# Altium PCB KorszeOBD.PcbDoc
Units mm, origin at the board's own origin, x right, y up, seen from the top; angles counter-clockwise.
Board outline 37.13 x 29 mm, 2 copper layers (Top Layer, Bottom Layer), stack 0.325 mm thick; 47 components, 37 nets, 207 pads, 0 vias.
Unrouted connection lines stored in the file: 112.
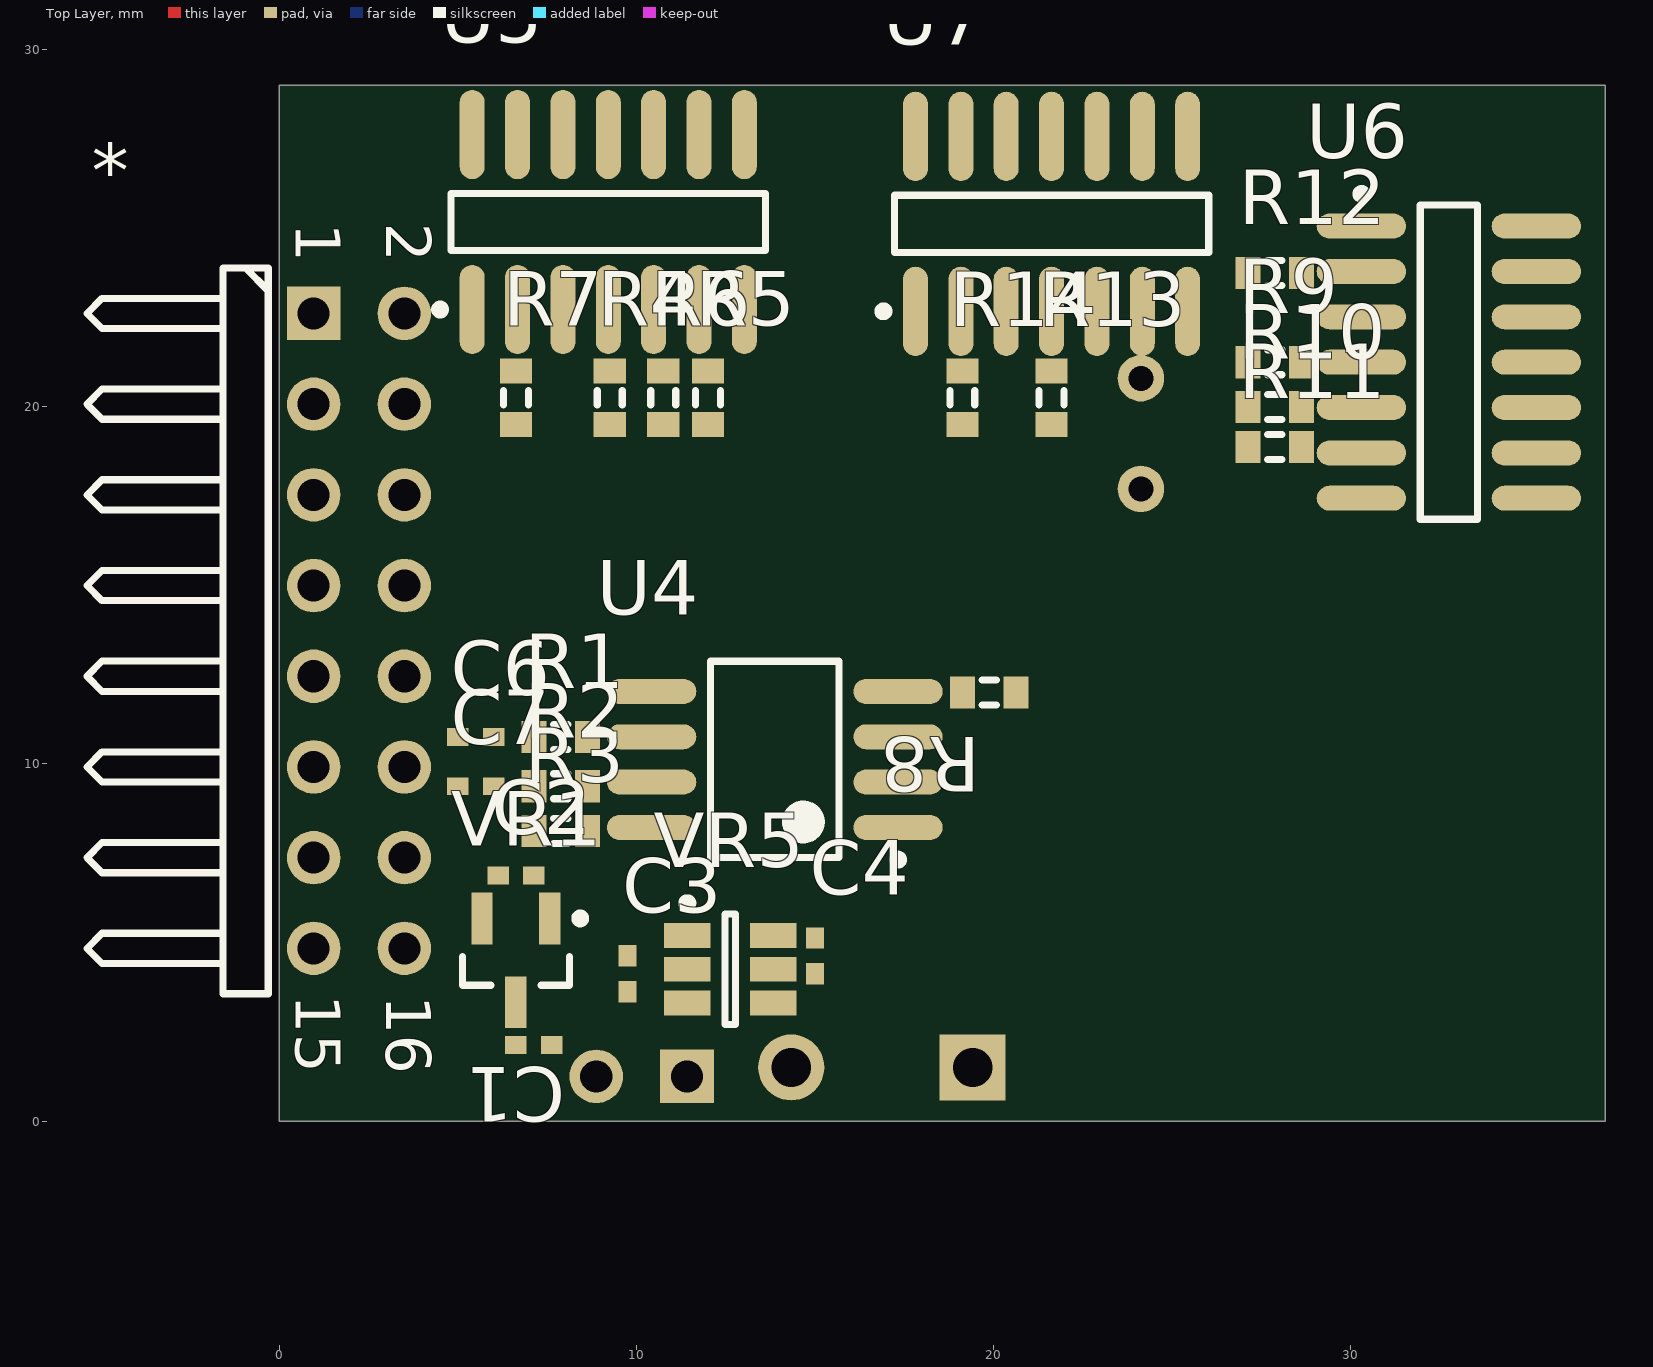
[diagram p0: Top Layer view]
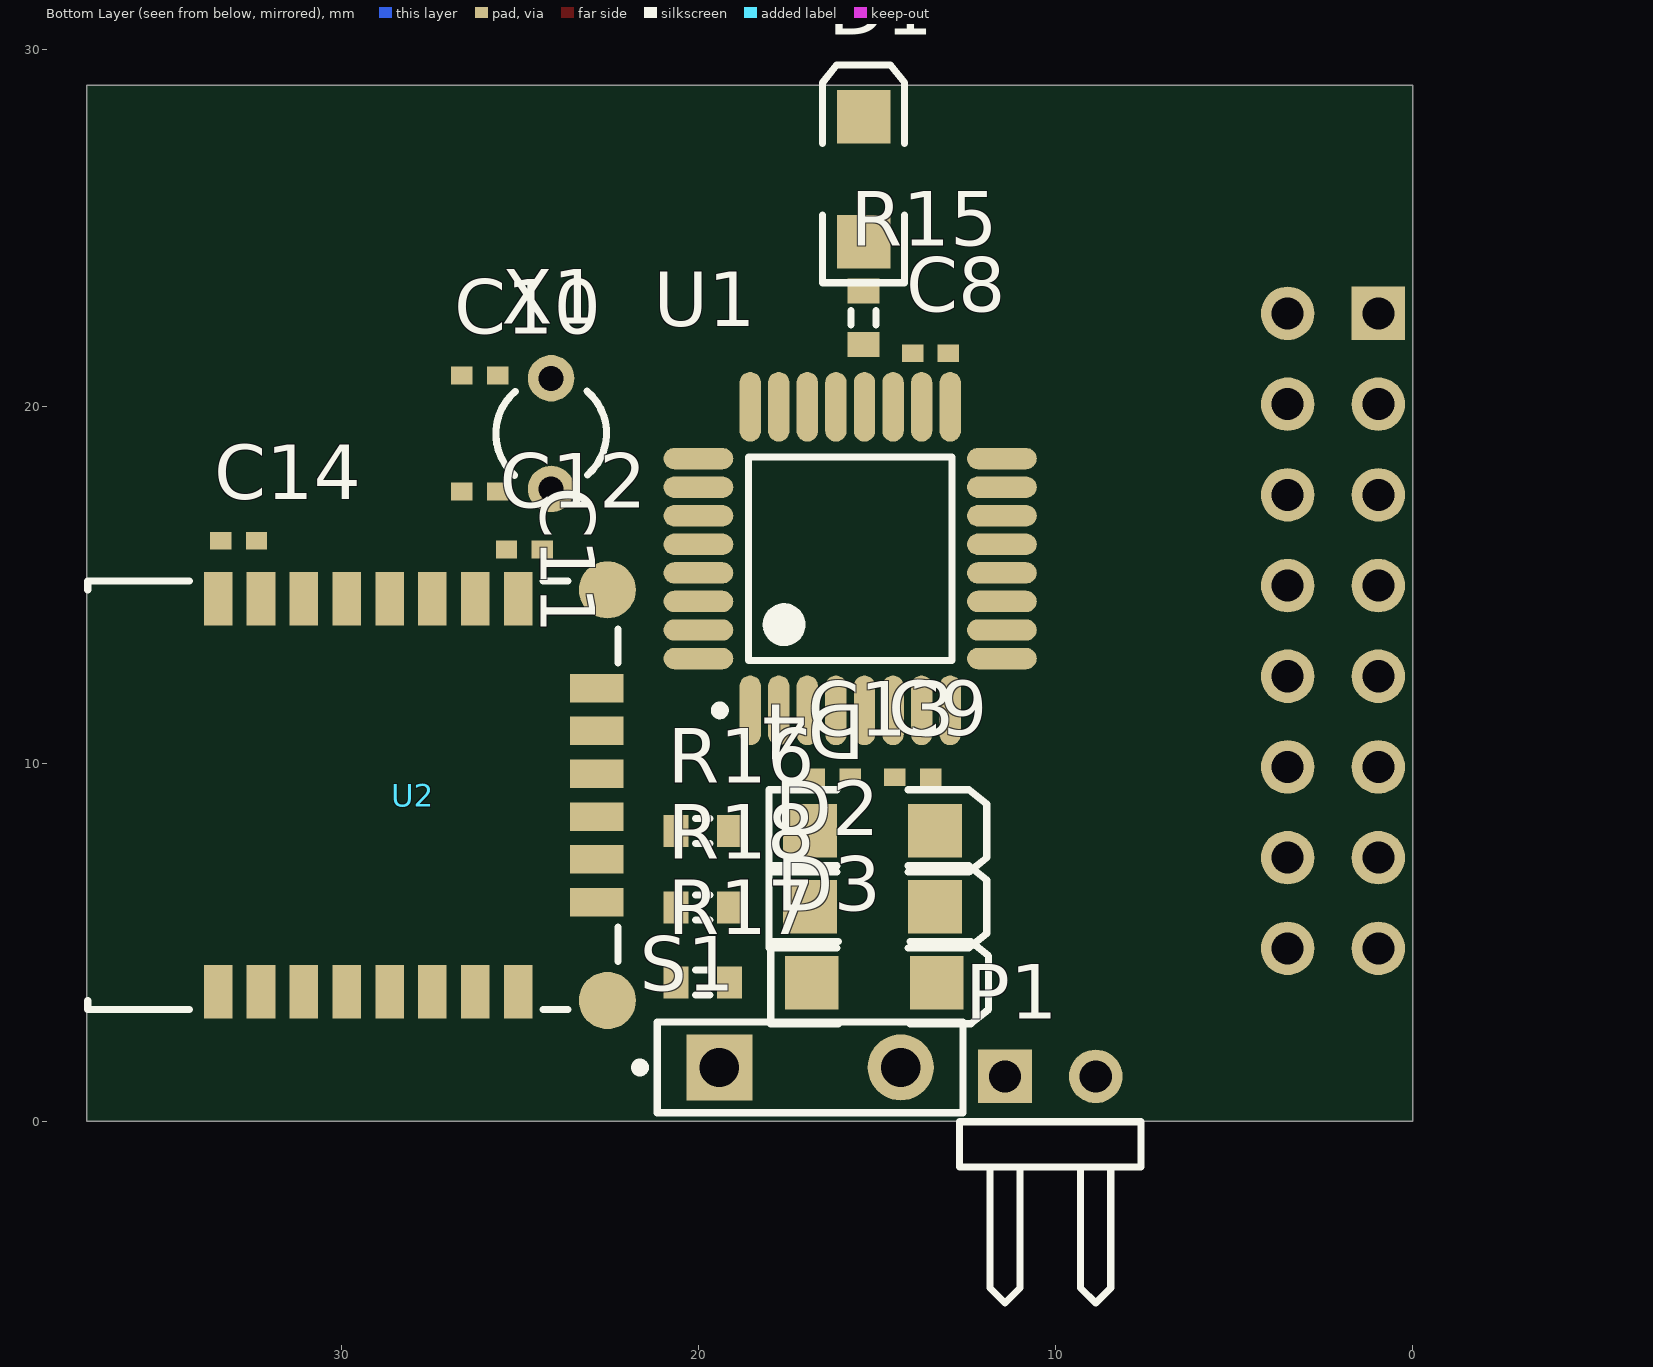
[diagram p1: Bottom Layer view, seen from below]

## Layer stack, top to bottom
Top Solder: solder mask 0.0102, Solder Resist, Dk 3.5
Top Layer: signal copper 0.0356
Dielectric1: core 0.254, FR-4, Dk 4.2
Bottom Layer: signal copper 0.0356
Bottom Solder: solder mask 0.0102, Solder Resist, Dk 3.5

## Board outline
0,0 0,29 37.125,29 37.125,0

## Design rules (kind name [scope] priority, off if disabled: settings)
Clearance [All] p1: gap=0.254
FabricationTestPointUsage TestPointUsage [All] p1: valid=0 allowmultiple=FALSE
FabricationTestpoint Testpoint [All] p1: side=3 testpointundercomponent=TRUE minsize=1.016 maxsize=2.54 preferedsize=1.524 minholesize=0 maxholesize=1.016 preferedholesize=0.813 testpointgrid=0.025 allowsidetop=TRUE allowsidebottom=TRUE usegrid=TRUE gridtolerance=0
PolygonConnect [All] p1: connectstyle=Relief reliefconductorwidth=0.254 reliefentries=4 polygonreliefangle="90 Angle" airgapwidth=0.254
RoutingVias [All] p1: holewidth=0.711 width=1.27 viastyle="Through Hole" minholewidth=0.711 minwidth=1.27 maxholewidth=0.711 maxwidth=1.27
SilkToSolderMaskClearance SilkscreenOverComponentPads [IsPad] p1: minsilkscreentomaskgap=0.254 clearancetoexposedcopper=TRUE
SolderMaskExpansion [All] p1: expansion=0.102
Width Width_Power [(InNet('12V') OR InNet('3.3V') OR InNet('5V'))] p1: maxlimit=0.254 minlimit=0.254 preferedwidth=0.254
Width [All] p2: maxlimit=0.254 minlimit=0.254 preferedwidth=0.254
27 further rules are at their usual default settings.

## Components (designator, comment, footprint, x,y, rotation, side; value= is the part's Value field where it differs from the comment)
* "ODBII" HDR2X8H 0.96,22.615 r270 top
C1 "1uF" 0402 7.125,2.125 r180 top
C2 "1uF" 0402 6.625,6.875 r180 top
C3 "1uF" 0402 9.75,4.125 r90 top
C4 "1uF" 0402 15,4.625 r90 top
C6 "560pF" 0402 5.5,10.75 r0 top
C7 "560pF" 0402 5.5,9.375 r180 top
C8 "100nF" 0402 13.5,21.5 r180 bottom
C9 "100nF" 0402 14,9.625 r180 bottom
C10 "20pF" 0402 26.125,20.875 r0 bottom
C11 "20pF" 0402 26.125,17.625 r0 bottom
C12 "100nF" 0402 24.875,16 r0 bottom
C13 "100nF" 0402 16.25,9.625 r180 bottom
C14 "4.7uF" 0402 32.875,16.25 r0 bottom
D1 "LED0" 3.2X1.6X1.1 15.375,26.375 r90 bottom
D2 "Blue" 3.2X1.6X1.1 15.125,6 r180 bottom
D3 "Red" 3.2X1.6X1.1 15.075,3.875 r180 bottom
D4 "Green" 3.2X1.6X1.1 15.125,8.125 r180 bottom
P1 "USB" HDR1X2H 11.415,1.25 r180 bottom
R1 "100" J1-0603 7.875,10.75 r0 top
R2 "100" J1-0603 7.875,9.375 r180 top
R3 "4.7k" J1-0603 7.875,8.125 r0 top
R4 "10k" J1-0603 9.25,20.25 r90 top
R5 "1.2k" J1-0603 12,20.25 r270 top
R6 "4.7k" J1-0603 10.75,20.25 r90 top
R7 "10k" J1-0603 6.625,20.25 r270 top
R8 "4.7k" J1-0603 19.875,12 r180 top
R9 "100k" J1-0603 27.875,21.25 r0 top
R10 "10k" J1-0603 27.875,20 r180 top
R11 "10k" J1-0603 27.875,18.875 r0 top
R12 "10k" J1-0603 27.875,23.75 r180 top
R13 "10k" J1-0603 21.625,20.25 r90 top
R14 "10k" J1-0603 19.125,20.25 r270 top
R15 "330" J1-0603 15.375,22.5 r90 bottom
R16 "330" J1-0603 19.875,8.125 r0 bottom
R17 "330" J1-0603 19.875,3.875 r0 bottom
R18 "330" J1-0603 19.875,5.98 r0 bottom
S1 "SW-PB" SPST-2 16.875,1.5 r180 bottom
U1 "SMT32F0" QFP32_M 15.75,15.75 r90 bottom
U2 "RN2020-V/RM" "RN4020 MODULE-24" 28,9.125 r90 bottom
U4 "MCP2551" SO8W_M 13.875,10.125 r180 top
U5 "LM339AD" SO14_M 9.21,25.175 r90 top
U6 "LM339AD" SO14_M 32.75,21.25 r0 top
U7 "LM339AD" SO14_M 21.625,25.125 r90 top
VR1 "MCP1703T-33" SOT-23_M 6.625,4.5 r270 top
VR5 "MCP1755T-5" SOT23-6_M 12.625,4.25 r0 top
X1 "8MHz" R38 24.125,19.25 r0 bottom

## Footprints (in the part's own frame and the unit in brackets; to place one, negate y for a bottom-side part, rotate by r counter-clockwise, add the part's x,y. Pads: shape width x height; smd on the part's side, far side on the other; paste and mask are expansions set on the pad)
3.2X1.6X1.1 [mm] "SMT LED; 2 Flat Leads"
  rect 1.5x1.5 smd: 1(-1.75,0) 2(1.75,0)
  silkscreen extent -2.9,-1.15 3.2,1.15
0402 [mm] "Chip Capacitor, Body 1.0x0.5mm, IPC High Density"
  rect 0.6x0.5 smd: 1(-0.5,0) 2(0.5,0)
  body extent -0.55,-0.3 0.55,0.3, height 1.3
HDR1X2H [mm] "Connector; Header; 2 Position; Right Angle"
  rect 1.5x1.5 hole 0.9: 1(0,0)
  round 1.5 hole 0.9: 2(2.54,0)
  silkscreen extent -1.27,-6.35 3.81,-1.27
HDR2X8H [mm] "Connector; Header; 8x2 Position; Right Angle"
  rect 1.5x1.5 hole 0.9: 1(0,0)
  round 1.5 hole 0.9: 2(0,2.54) 3(2.54,0) 4(2.54,2.54) 5(5.08,0) 6(5.08,2.54) 7(7.62,0) 8(7.62,2.54) 9(10.16,0) 10(10.16,2.54) 11(12.7,0) 12(12.7,2.54) 13(15.24,0) 14(15.24,2.54) 15(17.78,0) 16(17.78,2.54)
  silkscreen extent -1.27,-6.35 19.05,-1.27
J1-0603 [mm] "Chip Resistor, Body 1.6x0.8mm, IPC High Density"
  rect 0.7x0.9 smd: 1(-0.75,0) 2(0.75,0)
  silkscreen extent -0.2,-0.35 0.2,0.35, body extent -0.85,-0.48 0.85,0.48, height 0.9
QFP32_M [mm] "32-Pin Quad Flat Pack 0.8 mm Pitch, IPC Low Density"
  oval 1.95x0.6 smd: 1(-4.25,2.8) 2(-4.25,2) 3(-4.25,1.2) 4(-4.25,0.4) 5(-4.25,-0.4) 6(-4.25,-1.2) 7(-4.25,-2) 8(-4.25,-2.8) 17(4.25,-2.8) 18(4.25,-2) 19(4.25,-1.2) 20(4.25,-0.4) 21(4.25,0.4) 22(4.25,1.2) 23(4.25,2) 24(4.25,2.8)
  oval 0.6x1.95 smd: 9(-2.8,-4.25) 10(-2,-4.25) 11(-1.2,-4.25) 12(-0.4,-4.25) 13(0.4,-4.25) 14(1.2,-4.25) 15(2,-4.25) 16(2.8,-4.25) 25(2.8,4.25) 26(2,4.25) 27(1.2,4.25) 28(0.4,4.25) 29(-0.4,4.25) 30(-1.2,4.25) 31(-2,4.25) 32(-2.8,4.25)
  silkscreen extent -4.37,-2.85 2.85,3.78, body extent -3.5,-3.5 3.5,3.5, height 1.85
R38 [mm] "Crystal, Thru-Hole; 2 Leads; Body 3.1 x 8.2 mm (Dia.xH)"
  round 1.3 hole 0.7: 1(0,1.55) 2(0,-1.55)
  silkscreen extent -1.55,-1.19 1.55,1.17
"RN4020 MODULE-24" [mm]
  rect 1.5x0.8 smd: 1(-5.5,5.45) 2(-5.5,4.25) 3(-5.5,3.05) 4(-5.5,1.85) 5(-5.5,0.65) 6(-5.5,-0.55) 7(-5.5,-1.75) 8(-5.5,-2.95) 17(5.5,-2.95) 18(5.5,-1.75) 19(5.5,-0.55) 20(5.5,0.65) 21(5.5,1.85) 22(5.5,3.05) 23(5.5,4.25) 24(5.5,5.45)
  round 1.6 smd: 9(-5.75,-5.45) 16(5.75,-5.45)
  rect 0.8x1.5 smd: 10(-3,-5.15) 11(-1.8,-5.15) 12(-0.6,-5.15) 13(0.6,-5.15) 14(1.8,-5.15) 15(3,-5.15)
  silkscreen extent -6,-5.75 6,9.1, body extent -5.75,-5.45 5.75,14.05, height 2.3
SO8W_M [mm] "8-Pin Small Outline Package 1.27 mm Pitch, IPC Low Density"
  oval 2.5x0.7 smd: 1(-3.45,1.905) 2(-3.45,0.635) 3(-3.45,-0.635) 4(-3.45,-1.905) 5(3.45,-1.905) 6(3.45,-0.635) 7(3.45,0.635) 8(3.45,1.905)
  silkscreen extent -3.57,-2.75 1.8,2.93, body extent -2.73,-2.75 2.73,2.75, height 2.13
SO14_M [mm] "SOIC, 14-Leads, Body 8.7x3.9mm, Pitch 1.27mm, IPC Low Density"
  oval 2.5x0.7 smd: 1(-2.45,3.81) 2(-2.45,2.54) 3(-2.45,1.27) 4(-2.45,0) 5(-2.45,-1.27) 6(-2.45,-2.54) 7(-2.45,-3.81) 8(2.45,-3.81) 9(2.45,-2.54) 10(2.45,-1.27) 11(2.45,0) 12(2.45,1.27) 13(2.45,2.54) 14(2.45,3.81)
  silkscreen extent -2.57,-4.4 0.8,4.83, body extent -2,-4.38 2,4.38, height 1.75
SOT23-6_M [mm] "SOT23, 6-Leads, Body 2.9x1.6mm, Pitch 0.95mm, Lead Span 2.7mm, IPC Low Density"
  rect 1.3x0.7 smd: 1(-1.2,0.95) 2(-1.2,0) 3(-1.2,-0.95) 4(1.2,-0.95) 5(1.2,0) 6(1.2,0.95)
  silkscreen extent -1.32,-1.55 0.15,1.97, body extent -0.9,-1.55 0.9,1.55, height 1.45
SOT-23_M [mm] "SOT23, 3-Leads, Body 2.9x1.3mm, Pitch 0.95mm, Lead Span 2.5mm, IPC Low Density"
  rect 1.45x0.6 smd: 1(-1.175,0.95) 2(-1.175,-0.95) 3(1.175,0)
  silkscreen extent -1.3,-1.5 0.7,1.93, body extent -0.7,-1.5 0.7,1.5, height 1.1
SPST-2 [mm] "Switch; 2 Leads"
  rect 1.85x1.85 hole 1.1: 1(-2.54,0)
  round 1.85 hole 1.1: 2(2.54,0)
  silkscreen extent -4.89,-1.27 4.28,1.27

## Part data
C1 C2 C3 C4 C6 C7 C8 C9 C10 C11 C12 C13 C14: library part Cap, "Capacitor"
D1: "Typical INFRARED GaAs LED"
D2 D3 D4: library part LED0, "Typical INFRARED GaAs LED"
P1: library part "Header 2H", "Header, 2-Pin, Right Angle"
R1 R2 R3 R4 R5 R6 R7 R8 R9 R10 R11 R12 R13 R14 R15 R16 R17 R18: library part Res2, "Resistor"
S1: "Switch"
U1: library part STM32F030K6T6, "STM32F030K6T6"
U2: library part RN2020-V/RM123, "Microchip RN4020 Bluetooth"
U4: library part MCP2551-E/SN, "CAN Transceiver Michrochip Technology MCP2551-E/SN"
U5 U6 U7: "Low-Power Quad Voltage Comparator"
VR1 VR5: library part "Volt Reg", "Voltage Regulator"
X1: library part XTAL, "Crystal Oscillator"

## Nets (pads, with @x,y where several pads share a name; then routed paths per layer and width w, separated by ;. In a path a pad name is that pad's centre, name@x,y a point inside that pad or via, vN(x,y) a via of type N, cw(c..) or ccw(c..) an arc to the next point about the centre after c; other vN are vias at no path point)
3.3V: C2.2 C8.2 C12.2 C14.1 R7.2 R8.1 R12.2 R14.2 U1.1 U1.5 U1.17 U2.23 U5.3 U6.3 U7.3 VR1.2
5V: C4.2 R5.2 R10.2 U4.3 VR5.6
12V: *.16 C1.2 C3.2 VR1.3 VR5.1
"CAN HIGH": *.6 R2.1 U4.7
"CAN LOW": *.14 R1.2 U4.6
GND: *.4 *.5 C1.1 C2.1 C3.1 C4.1 C6.1 C7.2 C8.1 C9.2 C10.2 C11.2 C12.1 C13.2 C14.2 D1.2 D2.2 D3.2 D4.2 R3.1 R6.1 R11.1 S1.2 U1.16 U1.32 U2.1 U2.9 U2.16 U2.24 U4.2 U5.12 U6.12 U7.12 VR1.1 VR5.2
"ISO9141-2 K": *.7 R9.1 R9.2 U6.4
"ISO9141-2 K OUT": R12.1 U1.25 U6.2
"ISO9141-2 L": *.15
"J1850 BUS+": *.2 R4.1 R4.2 U5.4 U7.5
"J1850 BUS+ OUT": R7.1 U1.20 U5.2
"J1850 BUS-": *.10 R13.1 R13.2 U7.4
"J1850 OUT": R14.1 U1.24 U7.2
NetC6_2: C6.2 R1.1
NetC7_1: C7.1 R2.2
NetC9_1: C9.1 U1.6
NetC13_1: C13.1 S1.1 U1.4
NetD1_1: D1.1 R15.2
NetD2_1: D2.1 R16.1
NetD3_1: D3.1 R17.1
NetD4_1: D4.1 R18.1
NetR15_1: R15.1 U1.19
NetU1_26: U1.26 U2.8
NetU1_27: U1.27 U2.7
NON_INV: R5.1 R6.2 R10.1 R11.2 U5.5 U6.5
OSC_IN: C11.1 U1.3 X1.1
OSC_OUT: C10.1 U1.2 X1.2
PIO1: R16.2 U1.23 U2.10
PIO2: R17.2 U1.14 U2.11
PIO3: R18.2 U1.13 U2.12
RS: R3.2 U4.8
RXD: R8.2 U1.22 U4.4
TXD: U1.21 U4.1
UART2_RX_STM: U1.30 U2.5
UART2_TX_STM: U1.28 U2.6
USART2_RX_USB_TX: P1.1 U1.9
USART2_TX_USB_RX: P1.2 U1.8
pads on no net: *.1 *.3 *.8 *.9 *.11 *.12 *.13 U1.7 U1.10 U1.11 U1.12 U1.15 U1.18 U1.29 U1.31 U2.2 U2.3 U2.4 U2.13 U2.14 U2.15 U2.17 U2.18 U2.19 U2.20 U2.21 U2.22 U4.5 U5.1 U5.6 U5.7 U5.8 U5.9 U5.10 U5.11 U5.13 U5.14 U6.1 U6.6 U6.7 U6.8 U6.9 U6.10 U6.11 U6.13 U6.14 U7.1 U7.6 U7.7 U7.8 U7.9 U7.10 U7.11 U7.13 U7.14 VR5.3 VR5.4 VR5.5

## Silkscreen, mask and mechanical layers (free items; w line width, h text height)
Mechanical 16:
  drawing of 1874 lines, arcs and shapes, not listed
  text "1" at -79.286,89.259 h1.78
  text "2" at -6.642,89.259 h1.78
  text "3" at 66.51,89.259 h1.78
  text "4" at 139.408,89.259 h1.78
  text "A" at -113.627,66.247 h1.78
  text "A" at 173.393,66.247 h1.78
  text "B" at -113.627,18.19 h1.78
  text "B" at 61.75,13.625 h1.78
  text "C" at -113.627,-30.324 h1.78
  text "C" at 173.393,-30.324 h1.78
  text "ENGINEER:" at 58.458,-67.332 h1.14
  text "TITLE:" at 96.558,-67.332 h1.14
  text "PCB DESIGNER:" at 58.458,-74.825 h1.14
  text "D" at -113.627,-78.33 h1.78
  text "D" at 173.393,-78.33 h1.78
  text "DATE:" at 58.458,-82.572 h1.14
  text "PART NO.:" at 96.558,-82.572 h1.14
  text "REV:" at 149.898,-82.572 h1.14
  text "Altium Limited" at 25.438,-85.112 h1.78
  text ".PRINT_DATE" at 59.728,-85.62 h1.78
  text "12a Rodborough Rd" at 25.438,-87.652 h1.78
  text "Frenchs Forest" at 25.438,-90.192 h1.78
  text "FILE NAME:" at 58.458,-90.192 h1.14
  text "DWG NO:" at 96.558,-90.192 h1.14
  text "SCALE:" at 149.898,-90.192 h1.14
  text "NSW 2086" at 25.438,-92.732 h1.78
  text ".PCB_FILE_NAME_NO_PATH" at 59.728,-93.24 h1.78
  text "1" at -79.286,-98.701 h1.78
  text "2" at -6.642,-98.701 h1.78
  text "3" at 66.51,-98.701 h1.78
  text "4" at 139.408,-98.701 h1.78

## Text inside footprints (layer, text, board x,y; h text height)
*: Top Overlay "16" at 2.992,3.523 h1.27 r270; Top Overlay "15" at 0.452,3.546 h1.27 r270; Top Overlay "1" at 0.452,25.155 h1.27 r270; Top Overlay "2" at 2.992,25.155 h1.27 r270